# Altium PCB Legendre.PcbDoc
Units mm, origin at the board's own origin, x right, y up, seen from the top; angles counter-clockwise.
Board outline 99.95 x 50.04 mm, 2 copper layers (Top Layer, Bottom Layer); 32 components, 20 nets, 92 pads, 0 vias.
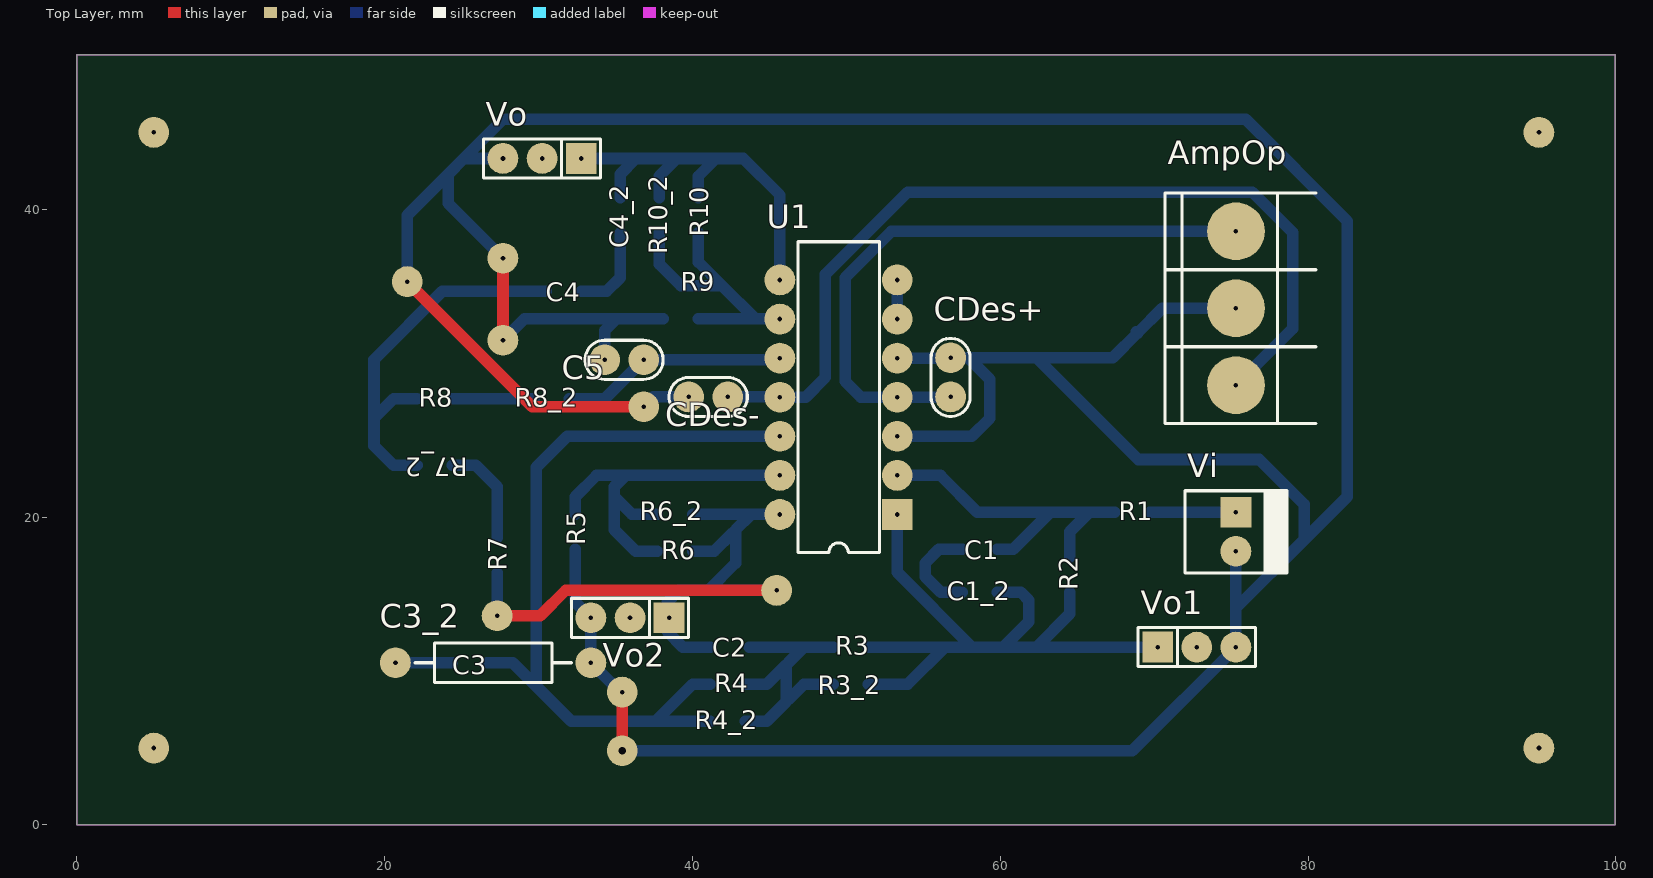
[diagram p0: Top Layer view]
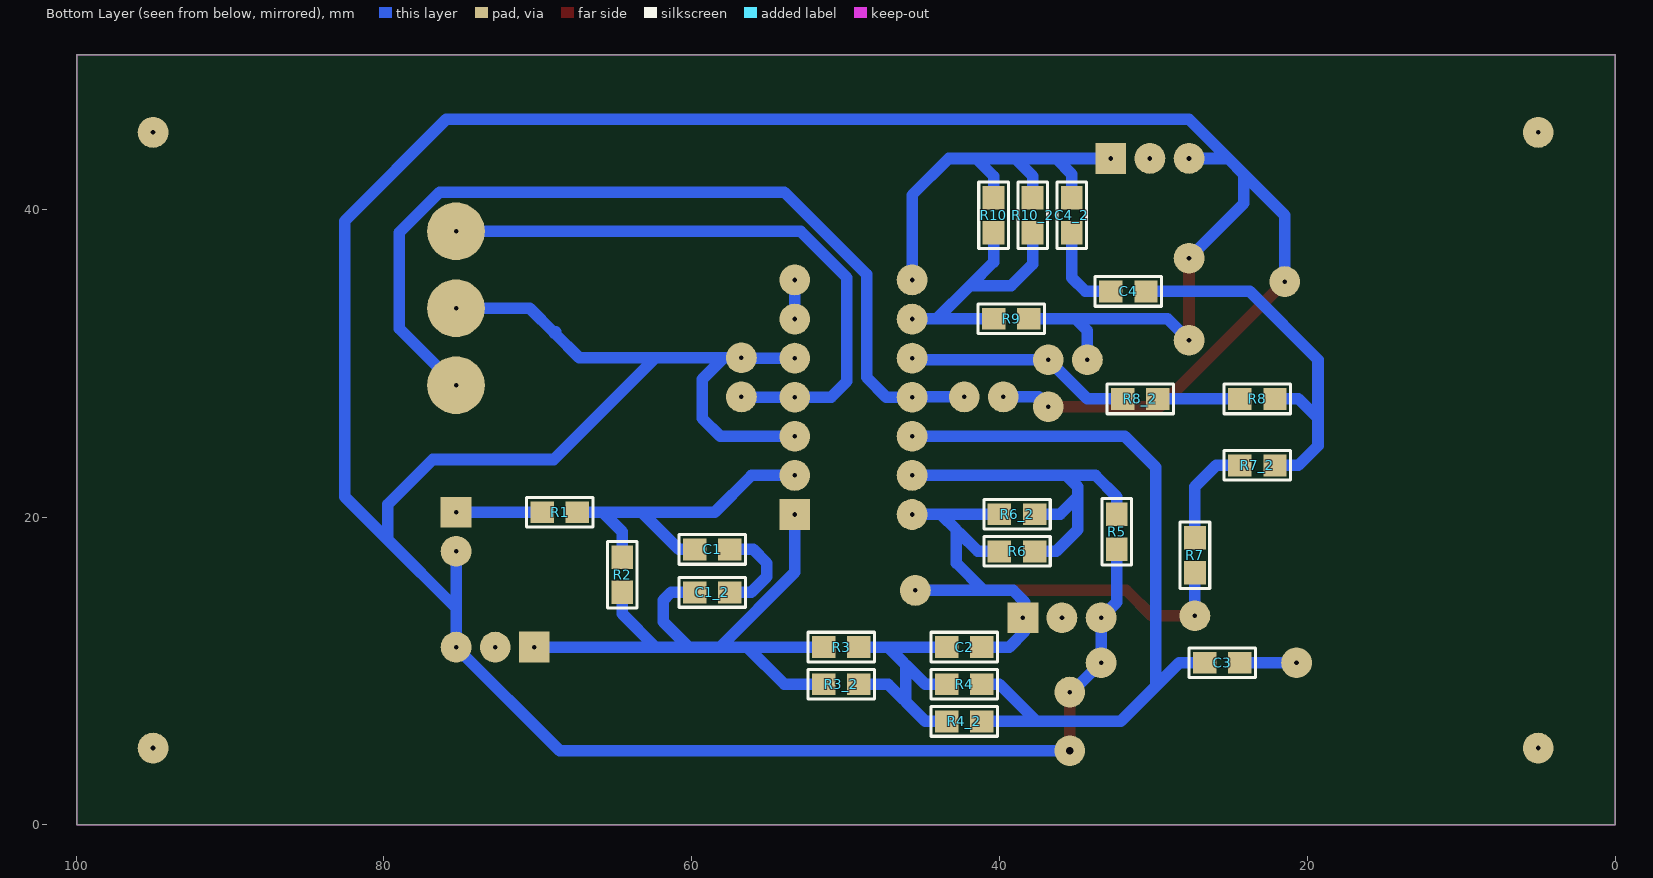
[diagram p1: Bottom Layer view, seen from below]
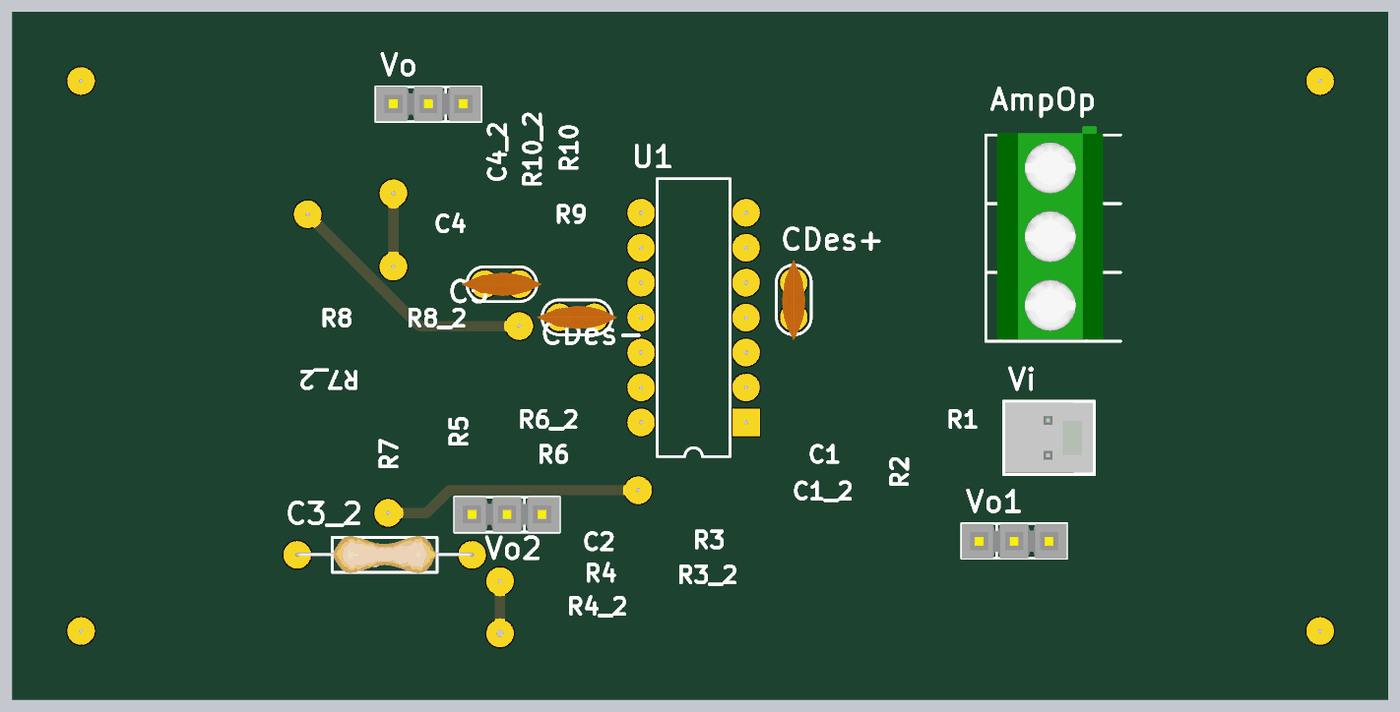
[diagram p2: 3D render of the assembled board from above, using the file's embedded part models]
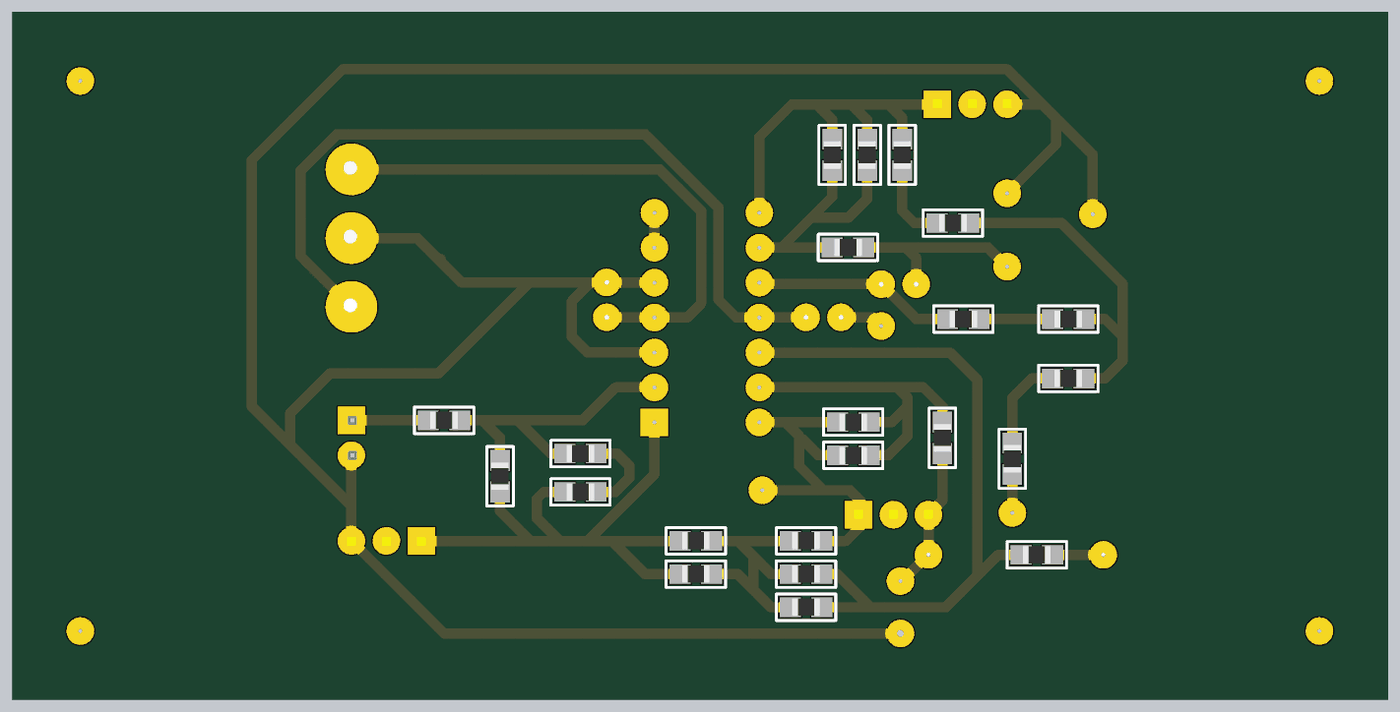
[diagram p3: 3D render of the assembled board from below, using the file's embedded part models]

## Layer stack, top to bottom
Top Solder: solder mask 0.0102, Solder Resist, Dk 3.5
Top Layer: signal copper 0.0356
Dielectric 1: dielectric 0.32, FR-4, Dk 4.8
Bottom Layer: signal copper 0.0356
Bottom Solder: solder mask 0.0102, Solder Resist, Dk 3.5

## Board outline
0,0 99.949,0 99.949,50.038 0,50.038

## Design rules (kind name [scope] priority, off if disabled: settings)
Clearance [All] p1: gap=0.3 ignorepadtopadclearanceinfootprint=FALSE
PolygonConnect [All] p1: connectstyle=Relief reliefconductorwidth=0.254 reliefentries=4 polygonreliefangle="90 Angle" airgapwidth=0.254
RoutingVias [All] p1: holewidth=0.5 width=2 viastyle="Through Hole" minholewidth=0.3 minwidth=2 maxholewidth=0.5 maxwidth=2
SolderMaskExpansion [All] p1: expansion=0.102
Width [All] p1: maxlimit=0.9 minlimit=0.6 preferedwidth=0.75
30 further rules are at their usual default settings.

## Components (designator, comment, footprint, x,y, rotation, side; value= is the part's Value field where it differs from the comment)
AmpOp "BORNERA 3" BORNERA3 75.311,33.575 r0 top
C1 "180p" 0805 58.674,17.907 r180 bottom
C1_2 "15n" 0805 58.674,15.113 r0 bottom
C2 "470n" 0805 42.291,11.557 r180 bottom
C3 "180n" 0805 25.527,10.541 r180 bottom
C3_2 "680n" RES500 20.701,10.541 r0 top
C4 "5.6n" 0805 31.623,34.671 r0 bottom
C4_2 "15n" 0805 35.306,39.624 r90 bottom
C5 "100p" CAP100 35.56,30.226 r180 top
CDes+ "100n" CAP100 56.769,29.083 r90 top
CDes- "100n" CAP100 41.021,27.813 r180 top
R1 "56k" 0805 68.58,20.32 r180 bottom
R2 "56k" 0805 64.516,16.256 r270 bottom
R3 "47" 0805 50.292,11.557 r180 bottom
R3_2 "56" 0805 50.292,9.144 r180 bottom
R4 "47" 0805 42.291,9.144 r180 bottom
R4_2 "56" 0805 42.291,6.731 r180 bottom
R5 "4.7M" 0805 32.385,19.05 r90 bottom
R6 "120" 0805 38.862,17.78 r0 bottom
R6_2 "220" 0805 38.862,20.193 r0 bottom
R7 "680" 0805 27.305,17.526 r90 bottom
R7_2 "6.8k" 0805 23.241,23.368 r180 bottom
R8 "680" 0805 23.241,27.686 r0 bottom
R8_2 "6.8k" 0805 30.861,27.686 r0 bottom
R9 "4.7M" 0805 39.243,32.893 r0 bottom
R10 "120" 0805 40.386,39.624 r90 bottom
R10_2 "220" 0805 37.846,39.624 r90 bottom
U1 "TL084J" J014 49.492,27.794 r90 top
Vi "MOLEX2" MOLEX2 75.311,20.32 r270 top
Vo "CON3" SIP3 30.226,43.307 r180 top
Vo1 "CON3" SIP3 72.771,11.557 r0 top
Vo2 "CON3" SIP3 35.941,13.462 r180 top

## Footprints (in the part's own frame and the unit in brackets; to place one, negate y for a bottom-side part, rotate by r counter-clockwise, add the part's x,y. Pads: shape width x height; smd on the part's side, far side on the other; paste and mask are expansions set on the pad)
0805 [mil] "Pasivo 0805"
  rect 60x56 smd: 1(-45,0) 2(45,0)
  silkscreen extent -85,-38 85,38, body extent -39,-25 39,25, height 15
BORNERA3 [mm] "Bornera con Tornillos 5mm separación"
  round 3.75 hole 0.3: 1(0,5) 2(0,0) 3(0,-5)
  silkscreen extent -4.6,-7.5 5.2,7.5, body extent -3.76,-7.39 3.94,8.11, height 10.05
CAP100 [mm]
  round 2 hole 0.3: 1(-1.27,0) 2(1.27,0)
  silkscreen extent -2.54,-1.27 2.54,1.27, body extent -2.92,-0.84 2.92,0.86, height 6.12
J014 [mm] "DIP; 14 Leads; Row Spacing 7.62 mm; Pitch 2.54 mm"
  rect 2x2 hole 0.3: 1(-7.62,-3.81)
  round 2 hole 0.3: 2(-5.08,-3.81) 3(-2.54,-3.81) 4(0,-3.81) 5(2.54,-3.81) 6(5.08,-3.81) 7(7.62,-3.81) 8(7.62,3.81) 9(5.08,3.81) 10(2.54,3.81) 11(0,3.81) 12(-2.54,3.81) 13(-5.08,3.81) 14(-7.62,3.81)
  silkscreen extent -10.1,-2.65 10.1,2.65
MOLEX2 [mm]
  rect 2x2 hole 0.3: 1(0,0)
  round 2 hole 0.3: 2(2.54,0)
  silkscreen extent -1.4,-3.3 3.94,3.3, body extent -1.27,-3.18 3.81,3.18, height 10.74
RES500 [mm]
  round 2 hole 0.3: 1(0,0) 2(12.7,0)
  silkscreen extent 1.27,-1.27 11.43,1.27, body extent -0.13,-1.33 12.83,1.37, height 3.02
SIP3 [mm]
  rect 2x2 hole 0.3: 1(-2.54,0)
  round 2 hole 0.3: 2(0,0) 3(2.54,0)
  silkscreen extent -3.81,-1.27 3.81,1.27, body extent -3.81,-1.3 3.81,1.24, height 8.38

## Part data
C1 C1_2 C2 C3 C3_2 C4 C4_2 C5 CDes+ CDes-: library part CAP
R1 R2 R3 R3_2 R4 R4_2 R5 R6 R6_2 R7 R7_2 R8 R8_2 R9 R10 R10_2: library part RES
U1: "JFET-Input Operational Amplifier", ComponentLink1Description="Manufacturer Link", ComponentLink1URL=http://www.ti.com/, ComponentLink2Description=Datasheet, ComponentLink2URL=http://www-s.ti.com/sc/ds/tl084.pdf, DatasheetVersion=Feb-1999, LatestRevisionDate=04-Mar-2005, LatestRevisionNote="Stylized 3D Model Added.", PackageDescription="DIP; 14 Leads; Row Spacing 7.62 mm; Pitch 2.54 mm", PackageReference=J014, PackageVersion=Jun-1999, Published=16-Jan-2001, Publisher="Altium Limited"

## Free pads (board coordinates)
  round 2 hole 0.3: 3(5,5) 3(5,45) 3(95,5) 3(95,45) 4(27.305,13.589) 5(45.466,15.24) 6(27.686,31.496) 7(36.83,27.178) 10(21.463,35.306) 13(27.686,36.83) 14(35.433,8.636)
  round 2 hole 0.5: 15(35.433,4.826)

## Nets (pads, with @x,y where several pads share a name; then routed paths per layer and width w, separated by ;. In a path a pad name is that pad's centre, name@x,y a point inside that pad or via, vN(x,y) a via of type N, cw(c..) or ccw(c..) an arc to the next point about the centre after c; other vN are vias at no path point)
GND: AmpOp.2 C3_2.2 C5.2 CDes+.2 CDes-.2 pad.6 pad.7 pad.10 pad.13 pad.14 pad.15 R5.1 R9.1 U1.3 U1.5 Vi.2 Vo1.3 Vo2.3 Vo.3 | length 271
  Top Layer w0.75: pad.10 29.591,27.178 pad.7 ; pad.6 pad.13 ; pad.15 pad.14
  Bottom Layer w0.75: pad.10 21.463,39.624 24.13,42.291 ; pad.6 29.083,32.893 35.052,32.893 ; pad.13 24.13,40.386 24.13,42.291 ; Vo.3 25.146,43.307 ; R5.1 32.385,14.478 Vo2.3 C3_2.2 35.306,8.636 pad.14 ; C5.2 34.29,32.131 35.052,32.893 ; pad.15 68.58,4.826 Vo1.3 75.311,14.097 ; pad.7 37.465,27.813 CDes-.2 ; R9.1 35.052,32.893 ; U1.3 58.147,25.254 59.309,26.416 59.309,28.956 57.912,30.353 ; U1.5 56.75,30.334 CDes+.2 57.912,30.353 ; 68.834,32.051 68.921,31.964 ; Vi.2 75.311,14.097 ; AmpOp.2 70.532,33.575 68.921,31.964 ; 24.13,42.291 25.146,43.307 ; 25.146,43.307 27.686,45.847 75.946,45.847 82.55,39.243 82.55,21.336 79.756,18.542 ; 57.912,30.353 62.357,30.353 ; 62.357,30.353 68.961,23.749 76.835,23.749 79.756,20.828 79.756,18.542 ; 62.357,30.353 67.31,30.353 68.921,31.964 ; 75.311,14.097 79.756,18.542
NetC1_1: C1.1 R1.2 R2.1 U1.2 | length 23
  Bottom Layer w0.75: U1.2 56.115,22.714 58.509,20.32 63.246,20.32 ; C1.1 60.833,17.907 63.246,20.32 ; R2.1 64.516,19.05 65.786,20.32 ; R1.2 65.786,20.32 ; 63.246,20.32 65.786,20.32
NetC1_2: C1.2 C1_2.1 | length 6.5
  Bottom Layer w0.75: C1_2.1 56.134,15.113 55.118,16.129 55.118,17.018 56.007,17.907 C1.2
NetC2_1: C2.1 R3.2 R3_2.2 R4.1 R4_2.1 | length 19
  Bottom Layer w0.75: R4_2.1 44.831,6.731 46.101,8.001 46.101,10.414 44.831,9.144 R4.1 ; C2.1@43.688,11.557 47.244,11.557 ; 46.228,8.128 47.244,9.144 R3_2.2 ; 46.228,10.541 47.244,11.557 ; R3.2 47.244,11.557
NetC3_1: C3.1 R4.2 R4_2.2 U1.12 | length 51.5
  Bottom Layer w0.75: C3.1 28.321,10.541 29.845,9.017 ; R4_2.2 37.592,6.731 ; R4.2 40.005,9.144 37.592,6.731 ; U1.12 45.678,25.25 31.854,25.25 29.845,23.241 29.845,9.017 ; 29.845,9.017 32.131,6.731 37.592,6.731
NetC3_2: C3.2 C3_2.1 | length 3.7
  Bottom Layer w0.75: C3_2.1 C3.2
NetC4_1: C4.1 R7_2.2 R8.1 | length 25.2
  Bottom Layer w0.75: R7_2.2 20.574,23.368 19.304,24.638 19.304,26.416 ; R8.1 20.574,27.686 19.304,26.416 ; C4.1 23.749,34.671 19.304,30.226 19.304,26.416
NetC4_2: C4.2 C4_2.1 | length 5.8
  Bottom Layer w0.75: C4.2 34.417,34.671 35.306,35.56 C4_2.1
NetC5_1: C5.1 R8_2.2 U1.10 | length 14.8
  Bottom Layer w0.75: R8_2.2 34.29,27.686 C5.1 45.574,30.226 U1.10 U1.10@45.663,30.353
NetR5_2: R5.2 R6.1 R6_2.1 U1.13 | length 25.5
  Bottom Layer w0.75: R5.2 32.385,21.336 33.763,22.714 35.668,22.714 ; R6.1 36.322,17.78 34.925,19.177 34.925,21.336 ; R6_2.1 36.068,20.193 34.925,21.336 ; U1.13 35.668,22.714 ; 34.925,21.336 34.925,21.971 35.668,22.714
NetR7_2: R7.2 R7_2.1 | length 6.8
  Bottom Layer w0.75: R7_2.1 25.908,23.368 27.305,21.971 R7.2
NetR8_2: R8.2 R8_2.1 | length 5.3
  Bottom Layer w0.75: R8.2 R8_2.1
NetR9_2: R9.2 R10.1 R10_2.1 U1.9 | length 19.1
  Bottom Layer w0.75: R10_2.1 37.846,36.449 39.243,35.052 41.021,35.052 41.91,35.052 ; R9.2 44.069,32.893 ; R10.1 40.386,36.576 41.91,35.052 ; U1.9 45.663,32.893 44.069,32.893 ; 41.91,35.052 44.069,32.893
NetU1_6: U1.6 U1.7 | length 2.5
  Bottom Layer w0.75: U1.6 U1.7
Vcc+: AmpOp.1 CDes+.1 U1.4 | length 40.7
  Bottom Layer w0.75: CDes+.1 56.75,27.794 U1.4 50.946,27.794 49.911,28.829 49.911,35.56 52.926,38.575 AmpOp.1
Vee-: AmpOp.3 CDes-.1 U1.11 | length 58.7
  Bottom Layer w0.75: CDes-.1 45.663,27.813 U1.11 47.352,27.794 48.641,29.083 48.641,35.775 53.991,41.125 76.367,41.125 78.994,38.498 78.994,32.258 AmpOp.3
Vin: R1.1 Vi.1 | length 5.6
  Bottom Layer w0.75: R1.1 Vi.1
Vo: C4_2.2 R10.2 R10_2.2 U1.8 Vo.1 | length 28.4
  Bottom Layer w0.75: Vo.1 36.322,43.307 ; C4_2.2 35.306,42.291 36.322,43.307 ; R10_2.2 37.846,42.164 38.989,43.307 ; R10.2 40.386,42.164 41.529,43.307 ; U1.8@45.663,35.433 U1.8 45.682,40.932 43.307,43.307 41.529,43.307 ; 36.322,43.307 38.989,43.307 ; 38.989,43.307 41.529,43.307
Vo1: C1_2.2 R2.2 R3.1 R3_2.1 U1.1 Vo1.1 | length 45.8
  Bottom Layer w0.75: R3_2.1 53.975,9.144 56.388,11.557 ; R3.1 56.388,11.557 ; U1.1 53.302,16.421 58.166,11.557 ; C1_2.2 61.341,15.113 61.849,14.605 61.849,13.208 60.198,11.557 ; R2.2 64.516,13.716 62.357,11.557 ; Vo1.1 62.357,11.557 ; 56.388,11.557 58.166,11.557 ; 58.166,11.557 60.198,11.557 ; 60.198,11.557 62.357,11.557
Vo2: C2.2 pad.4 pad.5 R6.2 R6_2.2 R7.1 U1.14 Vo2.1 | length 49.1
  Top Layer w0.75: pad.4 30.099,13.589 31.75,15.24 pad.5
  Bottom Layer w0.75: pad.4 R7.1 ; R6.2 41.402,17.78 42.608,18.986 ; R6_2.2 43.815,20.193 ; C2.2 39.37,11.557 38.354,12.573 38.354,14.478 39.116,15.24 41.021,15.24 ; pad.5 41.021,15.24 ; U1.14 45.663,20.193 43.815,20.193 ; 41.021,15.24 42.799,17.018 42.799,19.177 43.815,20.193
pads on no net: Vo1.2 Vo2.2 Vo.2

## Keep-outs
Keep-Out Layer:
  the board outline again, w0.1